# EAGLE board LED-Board-Layout (EAGLE 4.16)
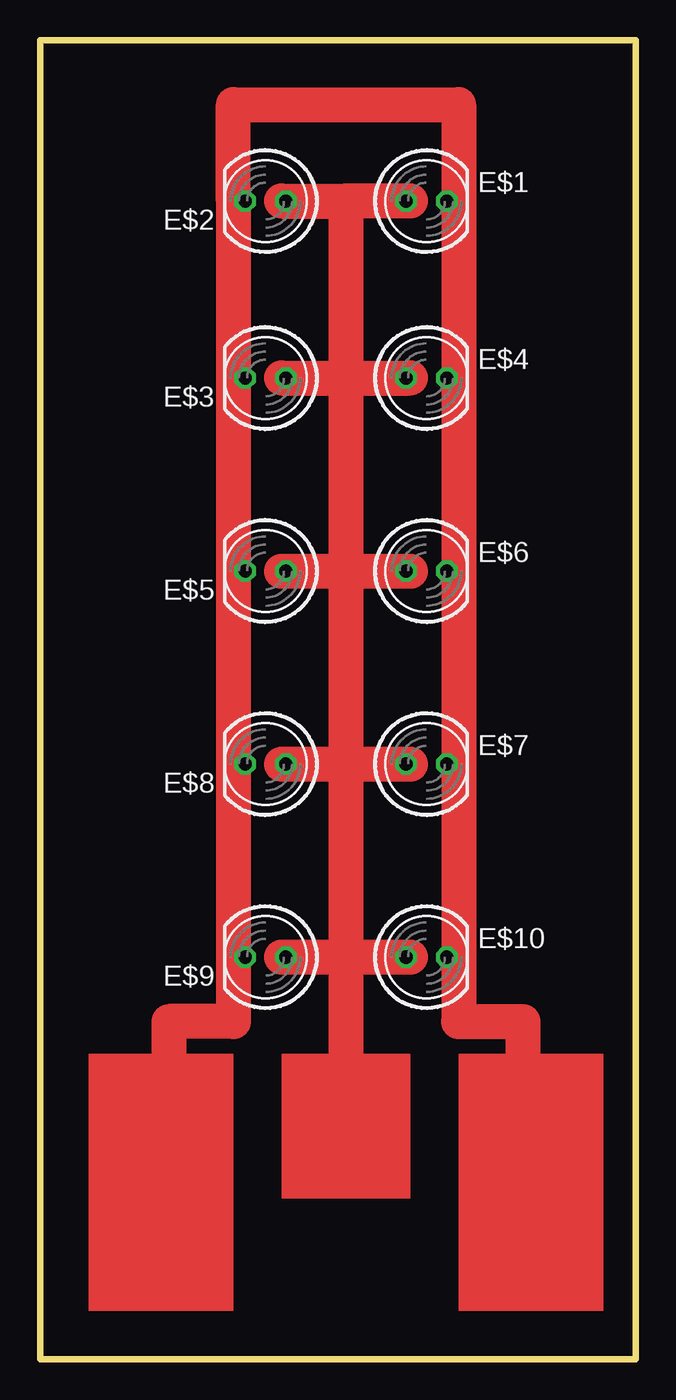
[diagram p0: board, top side]

Size 37 x 82 mm. Coordinates in mm from the lower left corner, seen from the top.
Outline: 0,0 37,0 37,82 0,82 0,0
Copper layers (1*16): Top 0.035mm / dielectric 1.5mm / Bottom 0.035mm
Design rules "default": minimum track width 10mil, minimum drill 24mil, track to track 8mil, track to pad 8mil, pad to pad 8mil, via to via 8mil, smd to smd 8mil, copper to edge 40mil, drill to drill 8mil, minimum pad ring 10mil, minimum via ring 8mil, stop-mask expansion 4mil, vias tented up to drill 0mil, thermal gap 10mil

## Footprints (pad centres in the part's own frame; a part is rotated, then mirrored left to right if it is on the bottom)
LED5MM = drill 0.813 octagon: A -1.27,0; K 1.27,0

## Placement (x,y rotation side)
E$1  [LED5MM]  24,72 0 top
E$2  [LED5MM]  14,72 180 top
E$3  [LED5MM]  14,61 180 top
E$4  [LED5MM]  24,61 0 top
E$5  [LED5MM]  14,49 180 top
E$6  [LED5MM]  24,49 0 top
E$7  [LED5MM]  24,37 0 top
E$8  [LED5MM]  14,37 180 top
E$9  [LED5MM]  14,25 180 top
E$10  [LED5MM]  24,25 0 top

## Library data of the parts
E$1-E$10 = led

## Tracks (layer width: path | path; a pad name or v marks a point on that pad's centre or on a via)
S$1
  Top 1.422: 19,72 23,72
  Top 2.184: 15,72 19,72 | 23,72 19,72 | 19,72 19,15
S$2
  Top 2.184: 15,61 23,61
S$3
  Top 2.184: 15,49 23,49
S$4
  Top 2.184: 15,37 23,37
S$5
  Top 2.184: 15,25 23,25
S$6
  Top 2.184: 30,6 30,21 26,21 26,72 26,78 12,78 12,72 12,21 8,21 8,6
(copper drawn outside any net)
  shapes: Top area x4